# Altium PCB PCB1.PcbDoc
Units mm, origin at the board's own origin, x right, y up, seen from the top; angles counter-clockwise.
Board outline 75.06 x 75.18 mm, 2 copper layers (Top Layer, Bottom Layer), stack 1.569 mm thick; 18 components, 10 nets, 38 pads, 0 vias.
Unrouted connection lines stored in the file: 28.
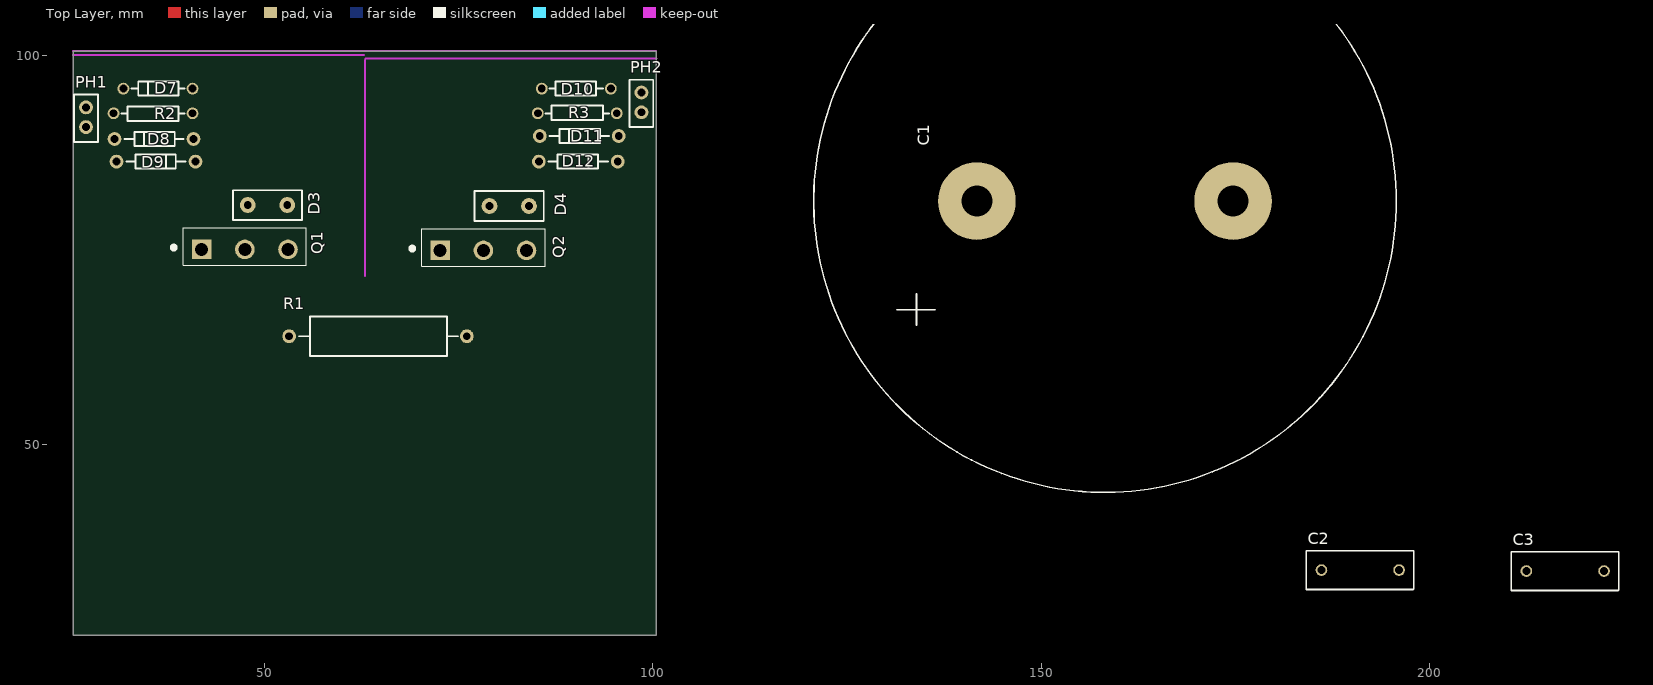
[diagram p0: Top Layer view]
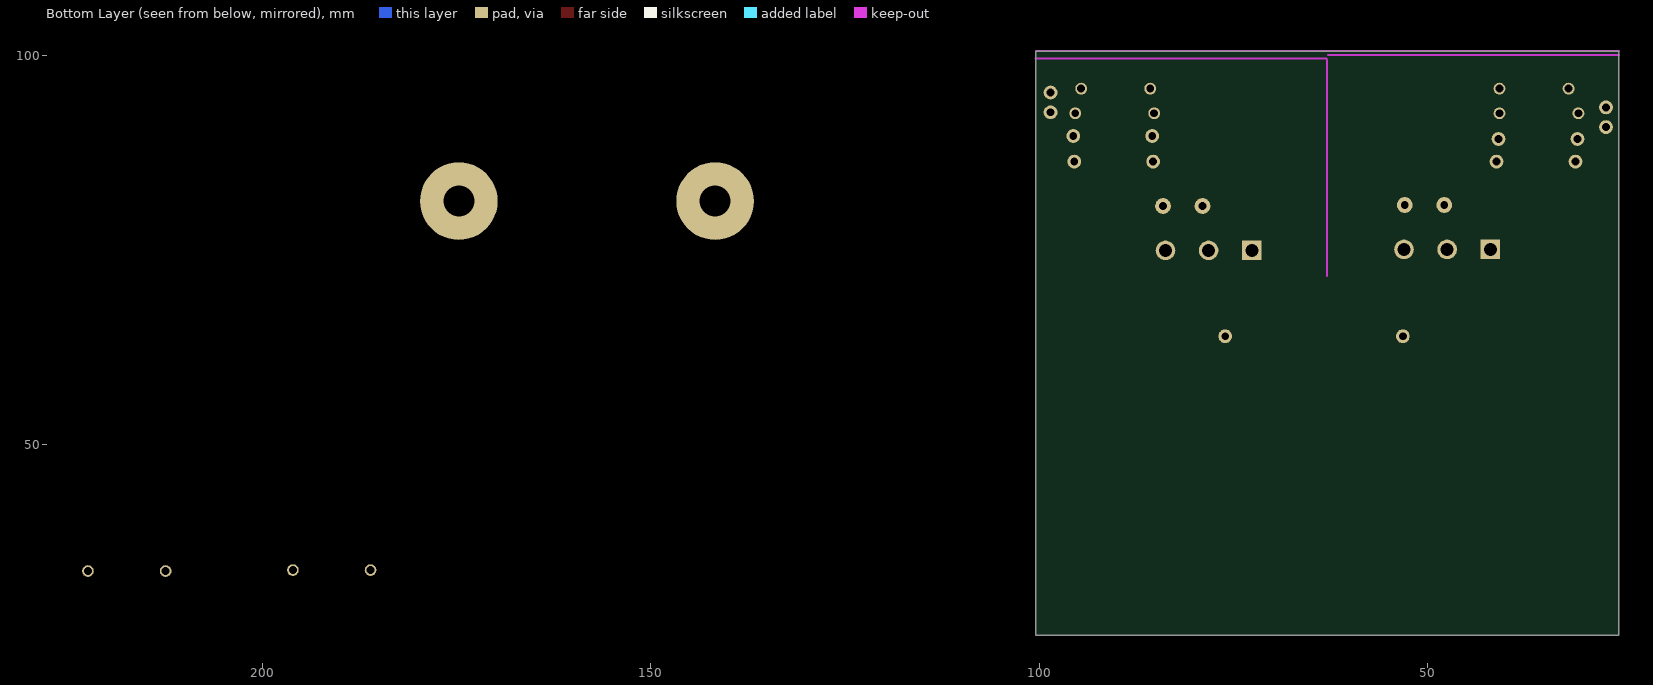
[diagram p1: Bottom Layer view, seen from below]

## Layer stack, top to bottom
Top Solder: solder mask 0.0254, SM-001, Dk 4
Top Layer: signal copper 0.035
Dielectric 1: core 1.4986, Core-043, Dk 4.3
Bottom Layer: signal copper 0.035
Bottom Solder: solder mask 0.0254, SM-001, Dk 4

## Board outline
25.4,25.4 100.457,25.4 100.457,100.584 25.4,100.584

## Design rules (kind name [scope] priority, off if disabled: settings)
Clearance [All] p1: gap=0.254 ignorepadtopadclearanceinfootprint=FALSE except(0: Arc-Hole Track-Hole SMDPad-Hole THPad-Hole Via-Hole Fill-Hole Poly-Hole Region-Hole Text-Hole)
PolygonConnect [All] p1: connectstyle=Relief reliefconductorwidth=0.254 reliefentries=4 polygonreliefangle="90 Angle" airgapwidth=0.254
RoutingVias [All] p1: holewidth=0.711 width=1.27 viastyle="Through Hole" minholewidth=0.711 minwidth=1.27 maxholewidth=0.711 maxwidth=1.27
SolderMaskExpansion [All] p1: expansion=0.102 istentingtop=FALSE
Width [All] p1: maxlimit=0.254 minlimit=0.254 preferedwidth=0.254
30 further rules are at their usual default settings.

## Components (designator, comment, footprint, x,y, rotation, side; value= is the part's Value field where it differs from the comment)
C1 "Capacitor 4700uF 450V" "Capacitor 4700uF 450V RIFA" 174.732,81.28 r180 top
C2 "Capacitor 100n 250V (Verniz)" "Capacitor 100n (cor verniz)" 196.088,33.782 r180 top
C3 "Capacitor 100n 250V (Verniz)" "Capacitor 100n (cor verniz)" 222.471,33.655 r180 top
D3 "MUR860" MUR860 47.879,80.772 r0 top
D4 "MUR860" MUR860 78.994,80.645 r0 top
D7 "Diode 1N4148" "Diode 8.89mm(350mils)" 40.767,95.758 r180 top
D8 "Zener 0.4" "Diode 0.4" 40.894,89.281 r180 top
D9 "Zener 0.4" "Diode 0.4" 30.988,86.36 r0 top
D10 "Diode 1N4148" "Diode 8.89mm(350mils)" 85.725,95.758 r0 top
D11 "Zener 0.4" "Diode 0.4" 95.631,89.662 r180 top
D12 "Zener 0.4" "Diode 0.4" 85.344,86.36 r0 top
PH1 "PinHead2" PinHead2 27.051,90.805 r90 top
PH2 "PinHead2" PinHead2 98.552,92.71 r90 top
Q1 "HGTG40N60A4" HGTG40N60A4 38.382,75.311 r0 top
Q2 "HGTG40N60A4" HGTG40N60A4 69.088,75.184 r0 top
R1 "Resistor 0.9(3W)" "Resistor Axial 0.9(3W)" 76.073,63.881 r180 top
R2 "Resistor 0.4" "Resistor Axial 0.4" 30.607,92.583 r0 top
R3 "Resistor 0.4" "Resistor Axial 0.4" 95.377,92.583 r180 top

## Footprints (in the part's own frame and the unit in brackets; to place one, negate y for a bottom-side part, rotate by r counter-clockwise, add the part's x,y. Pads: shape width x height; smd on the part's side, far side on the other; paste and mask are expansions set on the pad)
"Capacitor 100n (cor verniz)" [mm]
  round 1.5 hole 1: 1(0,0) 2(10,0)
  silkscreen extent -1.91,-2.5 11.94,2.5
"Capacitor 4700uF 450V RIFA" [mm]
  round 10 hole 4: 1(0,0) 2(33,0)
  silkscreen extent -21,-37.5 54,37.5
"Diode 0.4" [mil]
  round 70 hole 40: A(0,0) K(400,0)
  silkscreen extent 50,-35 350,35
"Diode 8.89mm(350mils)" [mil]
  round 60 hole 40: A(0,0) K(350,0)
  silkscreen extent 40,-35 310,35
HGTG40N60A4 [mm]
  rect 2.52x2.52 hole 1.68: 1(3.556,-0.254)
  round 2.52 hole 1.68: 2(9.116,-0.254) 3(14.676,-0.254)
  silkscreen extent -0.29,-2.29 17.06,2.53
MUR860 [mil]
  round 80 hole 40: 1(0,0) 3(200,0)
  silkscreen extent -75,-75 275,75
PinHead2 [mil]
  round 70 hole 40: 1(0,0) 2(100,0)
  silkscreen extent -75,-60 165,60
"Resistor Axial 0.4" [mil]
  round 60 hole 40: 1(0,0) 2(400,0)
  silkscreen extent 40,-40 360,35
"Resistor Axial 0.9(3W)" [mil]
  round 70 hole 40: 1(0,0) 2(900,0)
  silkscreen extent 45,-101 850,100

## Nets (pads, with @x,y where several pads share a name; then routed paths per layer and width w, separated by ;. In a path a pad name is that pad's centre, name@x,y a point inside that pad or via, vN(x,y) a via of type N, cw(c..) or ccw(c..) an arc to the next point about the centre after c; other vN are vias at no path point)
GND: C1.1 C3.1 D4.3 D12.K PH2.1 Q2.3 R1.1
NetD7_A: D7.A D8.K Q1.1 R2.2
NetD7_K: D7.K PH1.2 R2.1
NetD8_A: D8.A D9.A
NetD10_A: D10.A D11.K Q2.1 R3.2
NetD10_K: D10.K PH2.2 R3.1
NetD11_A: D11.A D12.A
Ouput_QSIDE: D3.3 D4.1 D9.K PH1.1 Q1.3 Q2.2
Output_CSIDE: C2.1 C3.2
VCC: C1.2 C2.2 D3.1 Q1.2 R1.2

## Keep-outs
Keep-Out Layer:
  lines w0.254: 25.4,100.076 62.865,100.076 ; 25.4,100.584 100.457,100.584 ; 62.992,71.628 62.992,99.441 ; 63.002,99.659 100.467,99.659